# Altium PCB OnlyController.PcbDoc
Units mm, origin at the board's own origin, x right, y up, seen from the top; angles counter-clockwise.
Board outline 199.06 x 48.59 mm, 8 copper layers (Top Layer, Internal Plane 1, Internal Plane 2, Internal Plane 3, Internal Plane 4, Internal Plane 5, Internal Plane 6, Bottom Layer), stack 0.605 mm thick; 1 components, 51 nets, 64 pads, 0 vias.
Unrouted connection lines stored in the file: 2.
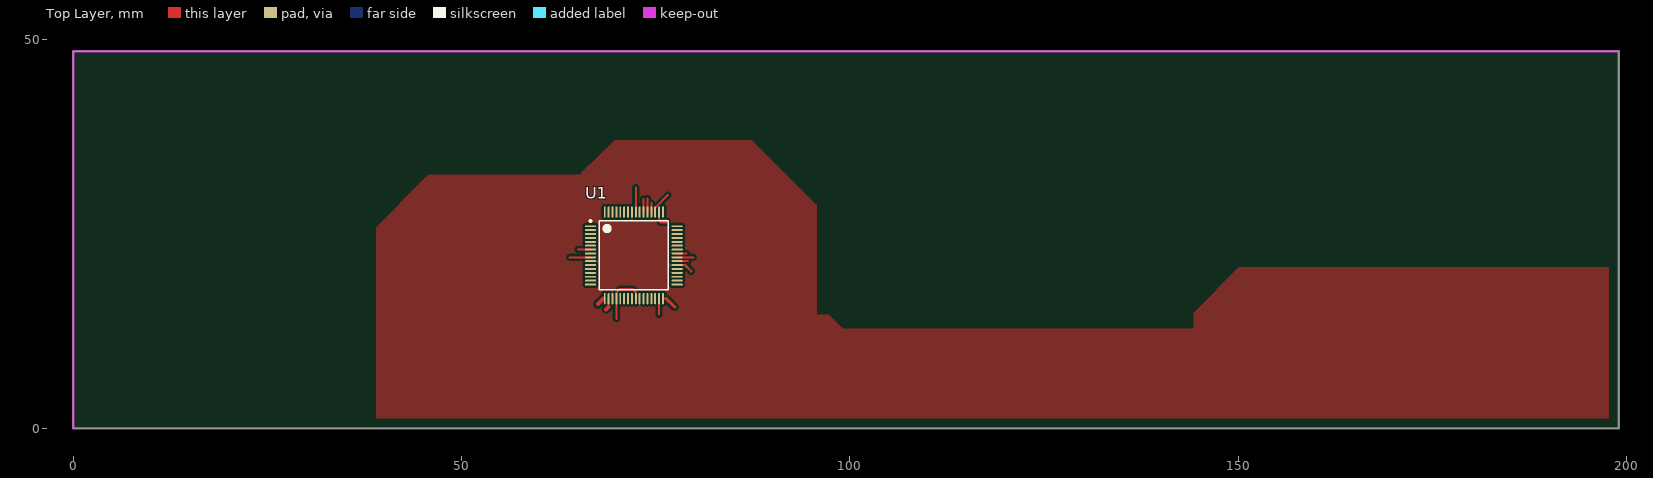
[diagram p0: Top Layer view]
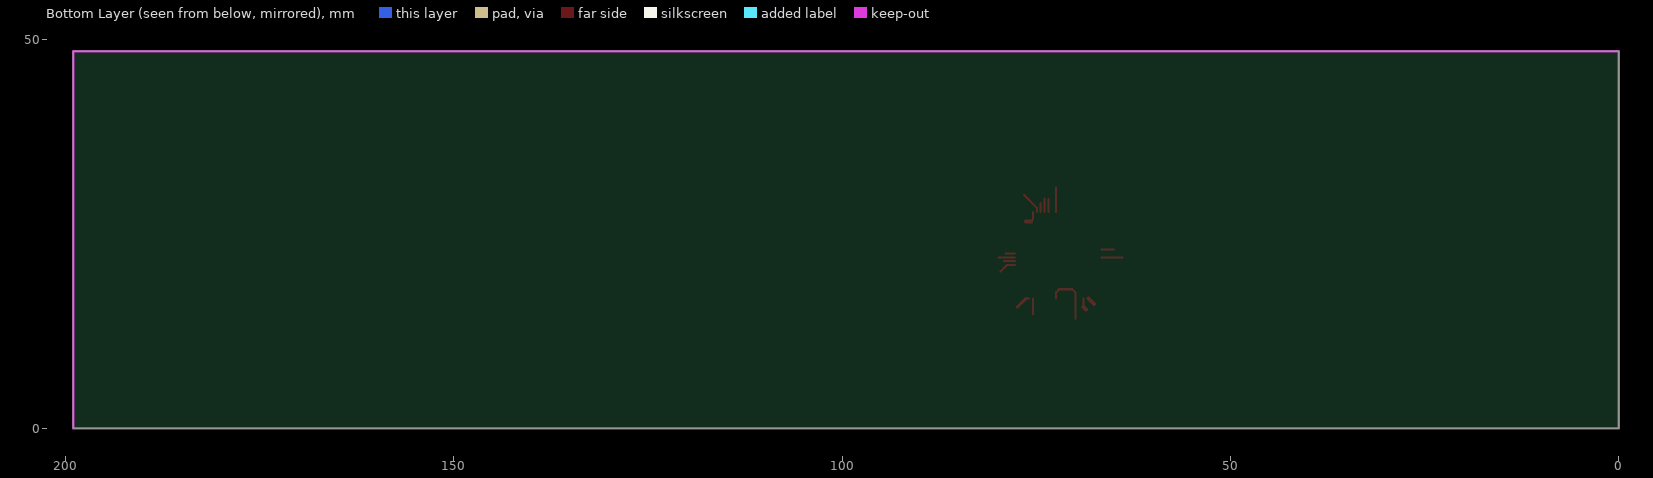
[diagram p1: Bottom Layer view, seen from below]
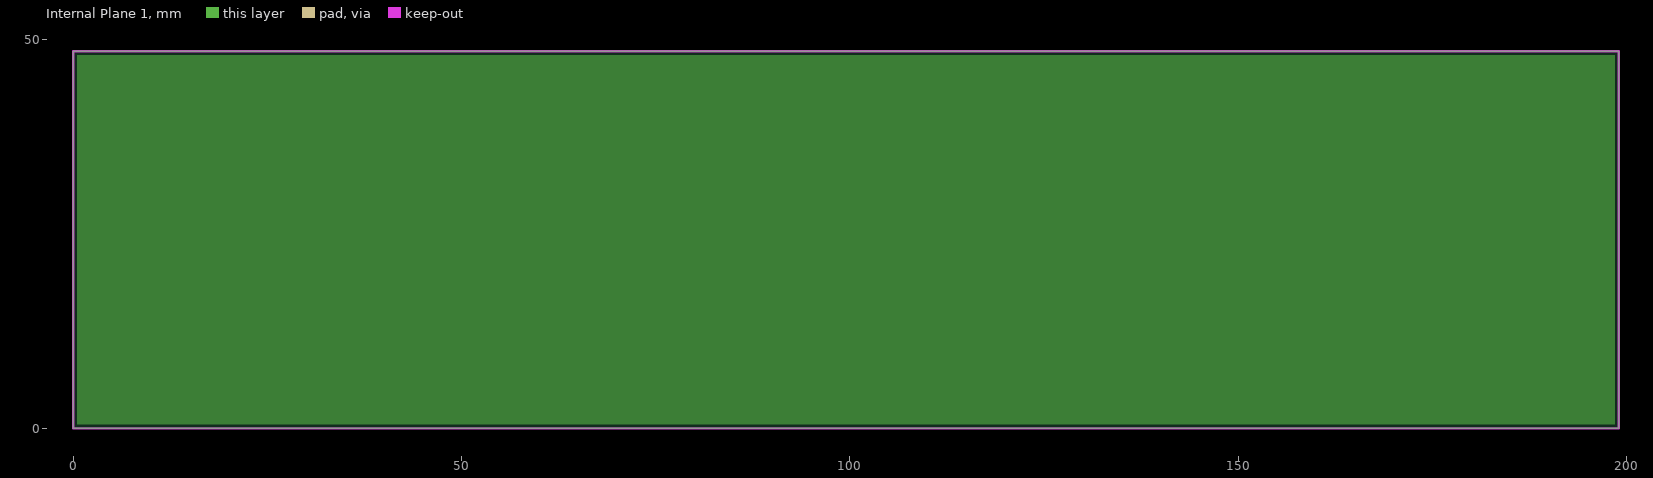
[diagram p2: Internal Plane 1, clearances drawn from the general rule]
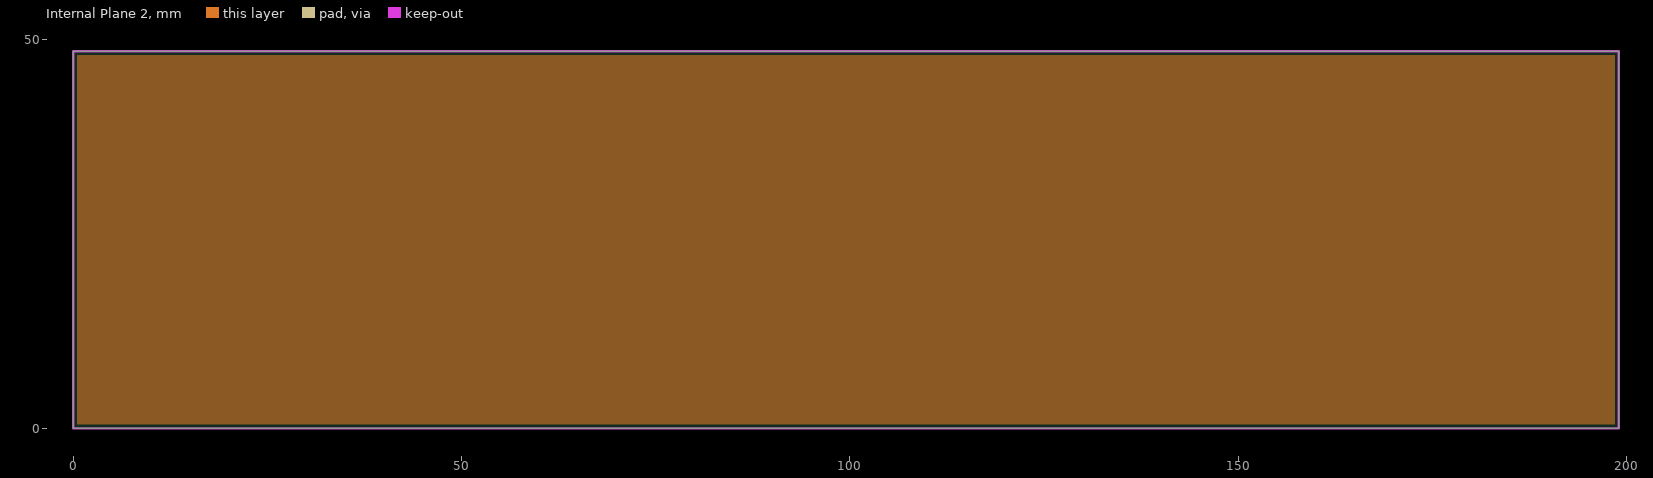
[diagram p3: Internal Plane 2, clearances drawn from the general rule]
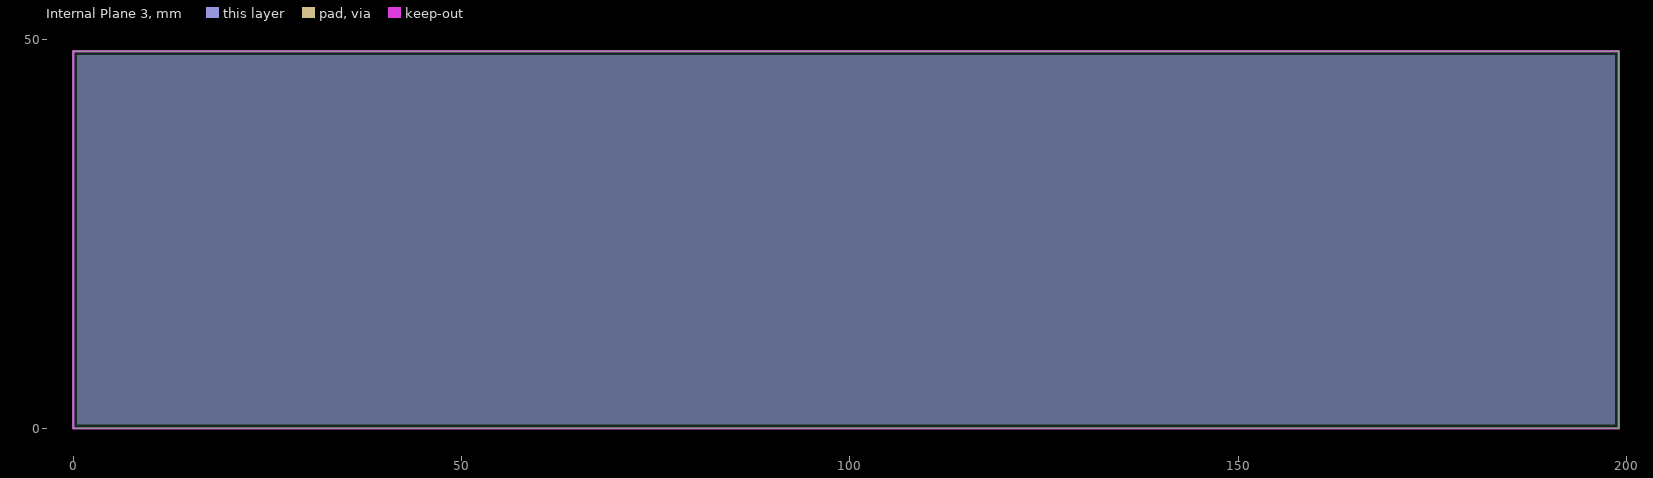
[diagram p4: Internal Plane 3, clearances drawn from the general rule]
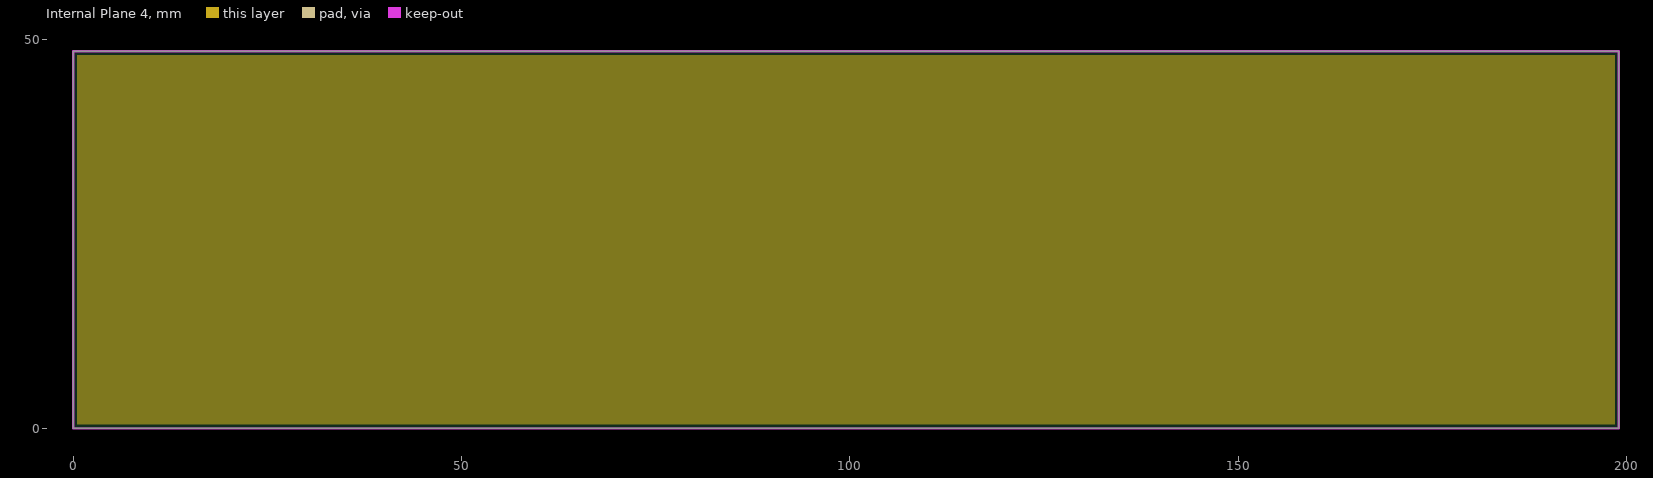
[diagram p5: Internal Plane 4, clearances drawn from the general rule]
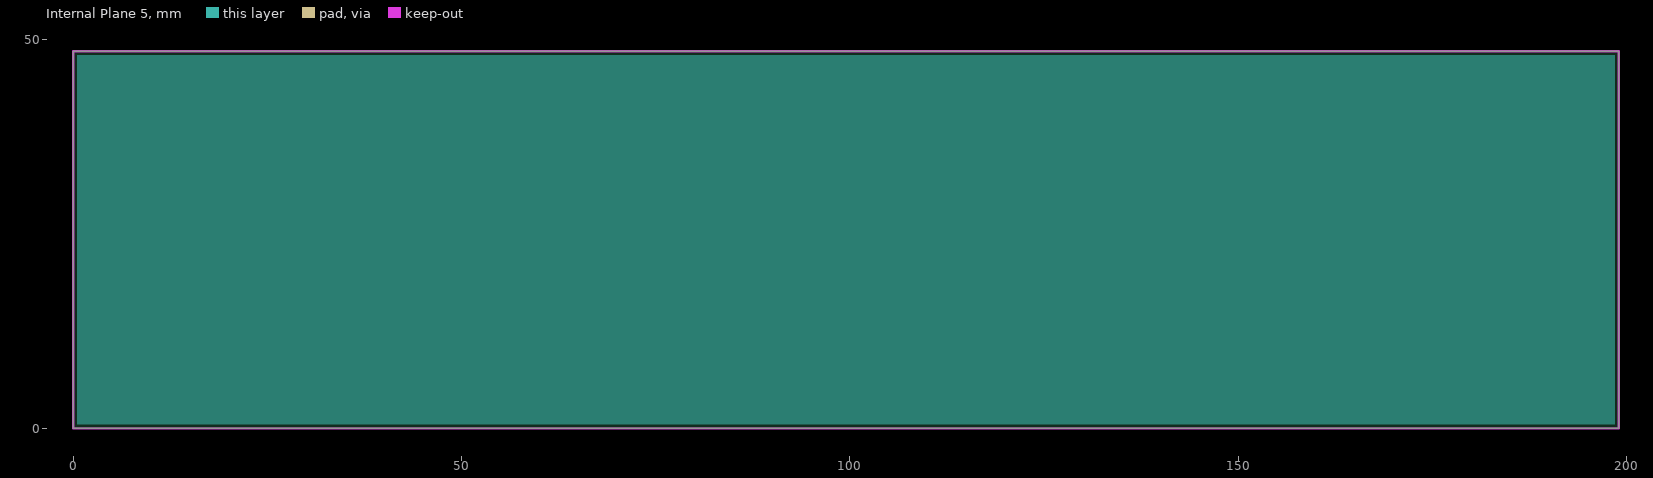
[diagram p6: Internal Plane 5, clearances drawn from the general rule]
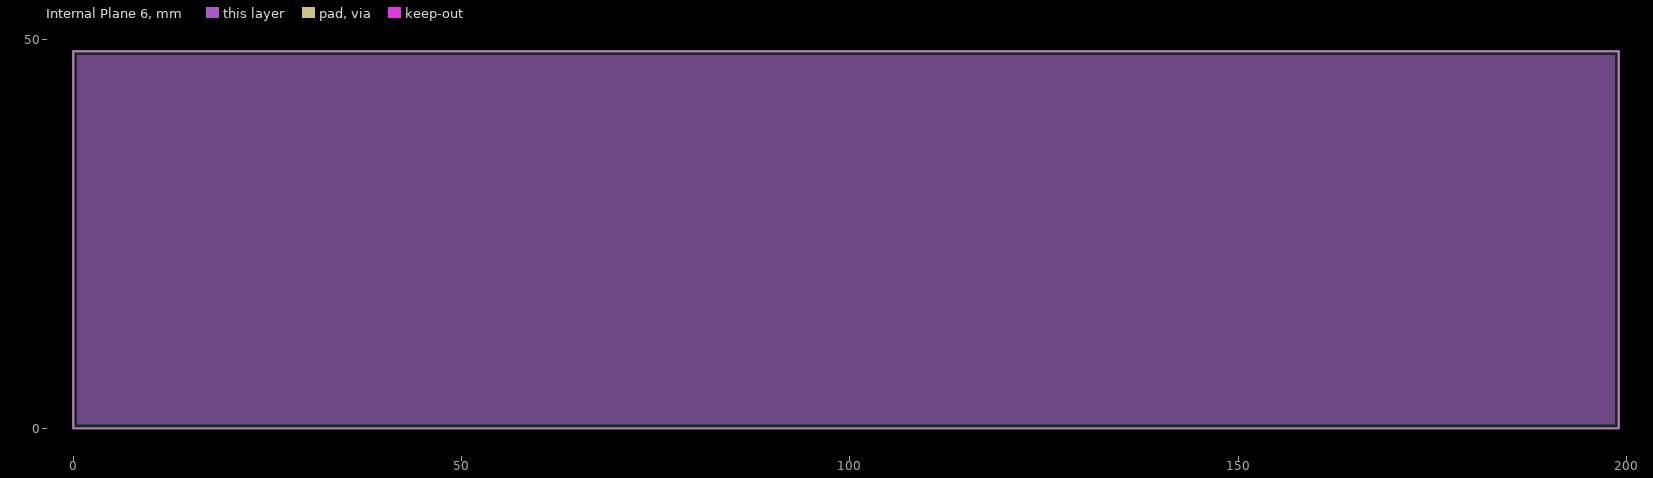
[diagram p7: Internal Plane 6, clearances drawn from the general rule]

## Layer stack, top to bottom
Top Solder: solder mask 0.0102, Solder Resist, Dk 3.5
Top Layer: signal copper 0.0356
Internal Plane 1: plane copper 0.0356
Internal Plane 2: plane copper 0.0356
Internal Plane 3: plane copper 0.0356
Internal Plane 4: plane copper 0.0356
Internal Plane 5: plane copper 0.0356
Internal Plane 6: plane copper 0.0356
Dielectric 1: dielectric 0.32, FR-4, Dk 4.8
Bottom Layer: signal copper 0.0356
Bottom Solder: solder mask 0.0102, Solder Resist, Dk 3.5

## Board outline
-0.025,-0.025 -0.025,48.565 199.034,48.565 199.034,-0.025

## Design rules (kind name [scope] priority, off if disabled: settings)
Clearance [All] p1: gap=0.3
PlaneClearance [All] p1: clearance=0.508
PlaneConnect [All] p1: planeconnectstyle=Relief reliefexpansion=0.508 reliefentries=4 reliefconductorwidth=0.5 reliefairgap=0.254
PolygonConnect [All] p1: connectstyle=Relief reliefconductorwidth=0.5 reliefentries=4 polygonreliefangle="90 Angle" airgapwidth=0.3
RoomDefinition NodeCardWithCan [InComponentClass('NodeCardWithCan')] p1: confinementstyle=ConfineIn formatcopy=TRUE lockcomponents=FALSE outline -50.8,-76.2 0,-76.2 0,-50.8 -50.8,-50.8
RoutingVias [All] p1: holewidth=0.7 width=1.1 viastyle="Through Hole" minholewidth=0.7 minwidth=1.1 maxholewidth=0.9 maxwidth=1.3
SolderMaskExpansion [All] p1: expansion=0.127
Width Power_Width [(InNet('CTRLGND') OR InNet('CTRLVCC+3.3') OR InNet('INPUTGND') OR InNet('INPUTVCC') OR InNet('MAINGND') OR InNet('MAINPOWER+24') OR InNet('OUTVCC+5'))] p1: maxlimit=1 minlimit=0.8 preferedwidth=0.8 minimp=50.000000 maximp=50.000000 favimp=50.000000
Width [All] p2: maxlimit=0.7 minlimit=0.5 preferedwidth=0.5 minimp=50.000000 maximp=50.000000 favimp=50.000000
28 further rules are at their usual default settings.

## Components (designator, comment, footprint, x,y, rotation, side; value= is the part's Value field where it differs from the comment)
U1 "DSPIC33EP512MC806-I/PT" MCHP-TQFP-PT64_N 72.183,22.263 r0 top

## Footprints (in the part's own frame and the unit in brackets; to place one, negate y for a bottom-side part, rotate by r counter-clockwise, add the part's x,y. Pads: shape width x height; smd on the part's side, far side on the other; paste and mask are expansions set on the pad)
MCHP-TQFP-PT64_N [mm] "TQFP, 64-Leads, Body 10x10mm, Pitch 0.5mm, IPC Medium Density"
  oval 1.45x0.25 smd: 1(-5.575,3.75) 2(-5.575,3.25) 3(-5.575,2.75) 4(-5.575,2.25) 5(-5.575,1.75) 6(-5.575,1.25) 7(-5.575,0.75) 8(-5.575,0.25) 9(-5.575,-0.25) 10(-5.575,-0.75) 11(-5.575,-1.25) 12(-5.575,-1.75) 13(-5.575,-2.25) 14(-5.575,-2.75) 15(-5.575,-3.25) 16(-5.575,-3.75) 33(5.575,-3.75) 34(5.575,-3.25) 35(5.575,-2.75) 36(5.575,-2.25) 37(5.575,-1.75) 38(5.575,-1.25) 39(5.575,-0.75) 40(5.575,-0.25) 41(5.575,0.25) 42(5.575,0.75) 43(5.575,1.25) 44(5.575,1.75) 45(5.575,2.25) 46(5.575,2.75) 47(5.575,3.25) 48(5.575,3.75)
  oval 0.25x1.45 smd: 17(-3.75,-5.575) 18(-3.25,-5.575) 19(-2.75,-5.575) 20(-2.25,-5.575) 21(-1.75,-5.575) 22(-1.25,-5.575) 23(-0.75,-5.575) 24(-0.25,-5.575) 25(0.25,-5.575) 26(0.75,-5.575) 27(1.25,-5.575) 28(1.75,-5.575) 29(2.25,-5.575) 30(2.75,-5.575) 31(3.25,-5.575) 32(3.75,-5.575) 49(3.75,5.575) 50(3.25,5.575) 51(2.75,5.575) 52(2.25,5.575) 53(1.75,5.575) 54(1.25,5.575) 55(0.75,5.575) 56(0.25,5.575) 57(-0.25,5.575) 58(-0.75,5.575) 59(-1.25,5.575) 60(-1.75,5.575) 61(-2.25,5.575) 62(-2.75,5.575) 63(-3.25,5.575) 64(-3.75,5.575)
  silkscreen extent -5.7,-4.45 4.45,4.55, body extent -5,-5 5,5, height 1.2

## Part data
U1: "16-Bit Microcontroller and Digital Signal Controller with High-Speed PWM, USB and Advanced Analog, 70 MIPS, 53 I/O, EPMP, -40 to 85 degC, 64-pin TQFP (PT64), Tray"

## Nets (pads, with @x,y where several pads share a name; then routed paths per layer and width w, separated by ;. In a path a pad name is that pad's centre, name@x,y a point inside that pad or via, vN(x,y) a via of type N, cw(c..) or ccw(c..) an arc to the next point about the centre after c; other vN are vias at no path point)
CANH: 
CANL: 
CANRX: U1.31 | length 2.1
  Top Layer w0.254: 75.433,14.636 U1.31
CANTX: U1.32 | length 2
  Top Layer w0.254: U1.32 76.378,16.688
  Top Layer w0.4: 76.378,16.688 77.445,15.621
CLOCK: U1.50 | length 2
  Top Layer w0.254: U1.50 75.433,26.868 75.692,26.609
  Top Layer w0.5: 75.692,26.609 76.342,26.609
CTRLGND: U1.9 U1.20 U1.25 U1.41 | length 10.9
  Top Layer w0.254: 63.921,22.013 U1.9 ; 69.933,14.093 U1.20 69.933,17.456 70.358,17.882 ; U1.25 72.433,17.522 ; U1.41 78.977,22.513
  Top Layer w0.3: 70.358,17.882 72.073,17.882 72.433,17.522
CTRLVCC+3.3: U1.10 U1.19 U1.26 U1.38 U1.57 | length 2.1
  Top Layer w0.254: U1.38 78.784,21.013
  Top Layer w0.3: 78.784,21.013 79.578,20.218
DATA_IN: U1.54 | length 1.7
  Top Layer w0.254: U1.54 73.433,29.542
DATA_OUT: U1.53 | length 1.8
  Top Layer w0.254: U1.53 73.933,29.61
INPUTGND: 
INPUTVCC: 
MAINGND: 
MAINPOWER+24: 
NetC1_2: U1.39 | length 1.4
  Top Layer w0.254: U1.39 79.172,21.513
NetC2_2: U1.40 | length 2.1
  Top Layer w0.254: U1.40 79.849,22.013
NetC3_1: 
NetC3_2: 
NetC7_2: U1.56 | length 3.2
  Top Layer w0.254: U1.56 72.433,30.992
NetD2_2: 
NetJ1_1: 
NetJ1_2: 
NetJ1_3: 
NetJ1_4: 
NetJ1_5: 
NetLED1_1: 
NetLED2_1: 
NetLED3_1: 
NetR1_1: 
NetR2_2: 
NetR3_2: 
NetR4_1: 
NetR6_1: 
NetR7_2: 
NetR8_1: 
NetR9_2: 
NetR10_1: 
NetR10_2: 
NetR14_1: 
NetR15_1: 
NetR15_2: 
NetR16_1: 
NetR16_2: 
NetR17_2: 
NetU10_2: 
NetU10_5: 
OUT_ENABLE: U1.52 | length 1.2
  Top Layer w0.254: U1.52 74.433,29.018
OUTVCC+5: 
PGC: U1.17 | length 1
  Top Layer w0.5: 67.564,15.994 68.258,16.688
PGD: U1.18 | length 1.5
  Top Layer w0.254: 68.933,15.633 U1.18
  Top Layer w0.5: 68.605,15.306 68.933,15.633
STROBE: U1.51 | length 2.9
  Top Layer w0.254: U1.51 74.933,28.399 76.581,30.047
VPP: U1.7 | length 1.6
  Top Layer w0.254: 64.973,23.013 U1.7
pads on no net: U1.1 U1.2 U1.3 U1.4 U1.5 U1.6 U1.8 U1.11 U1.12 U1.13 U1.14 U1.15 U1.16 U1.21 U1.22 U1.23 U1.24 U1.27 U1.28 U1.29 U1.30 U1.33 U1.34 U1.35 U1.36 U1.37 U1.42 U1.43 U1.44 U1.45 U1.46 U1.47 U1.48 U1.49 U1.55 U1.58 U1.59 U1.60 U1.61 U1.62 U1.63 U1.64

## Polygon pours and split planes (outlines as drawn)
CTRLVCC+3.3 on Top Layer "Bottom Layer-No Net" (solid, pour order 10): 38.989,1.3 38.989,25.908 45.212,32.131 45.72,32.639 65.405,32.639 65.405,32.893 69.723,37.084 69.85,37.084 87.249,37.084 87.376,37.084 95.631,28.829 95.758,28.702 95.758,14.605 97.282,14.605 99.06,12.827 144.272,12.827 144.272,14.859 150.114,20.701 197.7,20.701 197.7,1.3

## Keep-outs
Keep-Out Layer:
  the board outline again, w0.3

## Silkscreen, mask and mechanical layers (free items; w line width, h text height)
Mechanical 3:
  the board outline again, w0.1